# Altium PCB seven_segment_driver.PcbDoc
Units mil, origin at the board's own origin, x right, y up, seen from the top; angles counter-clockwise.
Board outline 8480 x 2790 mil, 2 copper layers (Top Layer, Bottom Layer); 28 components, 48 nets, 176 pads, 263 vias.
Unrouted connection lines stored in the file: 31.
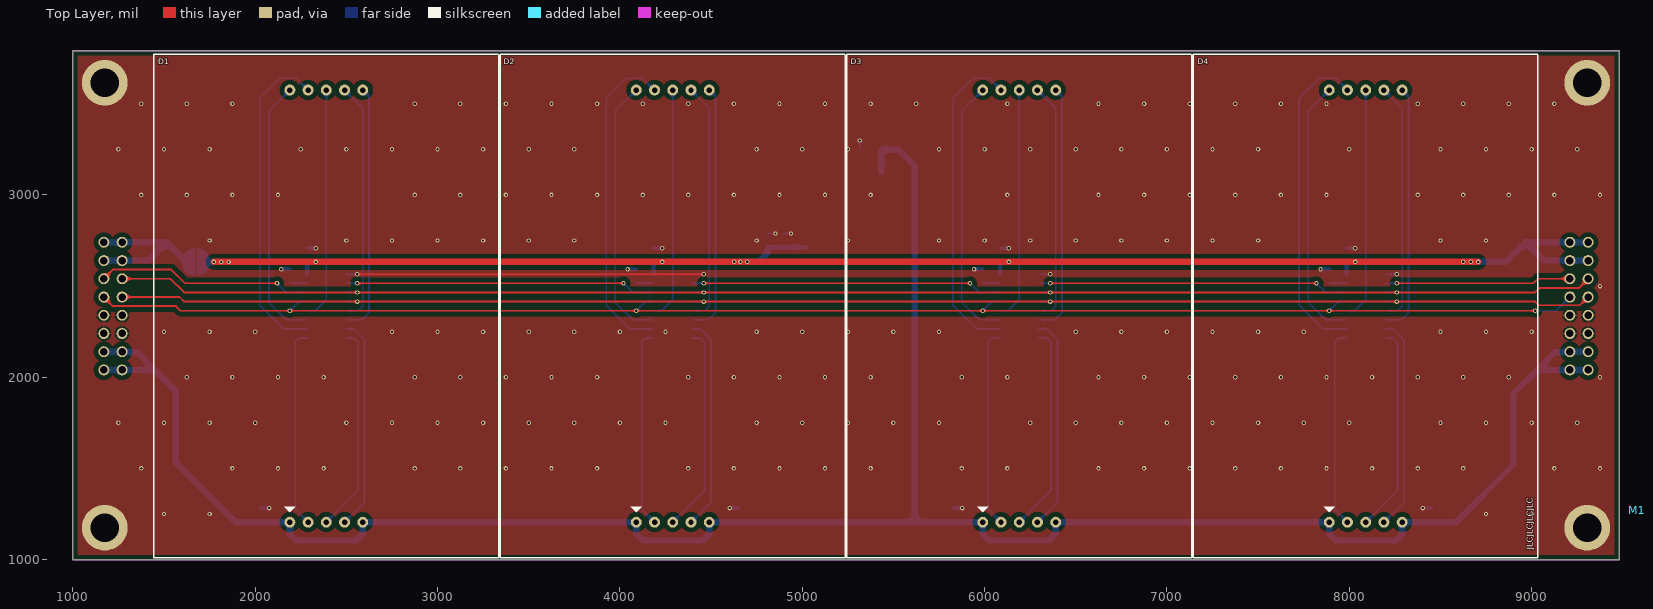
[diagram p0: Top Layer view]
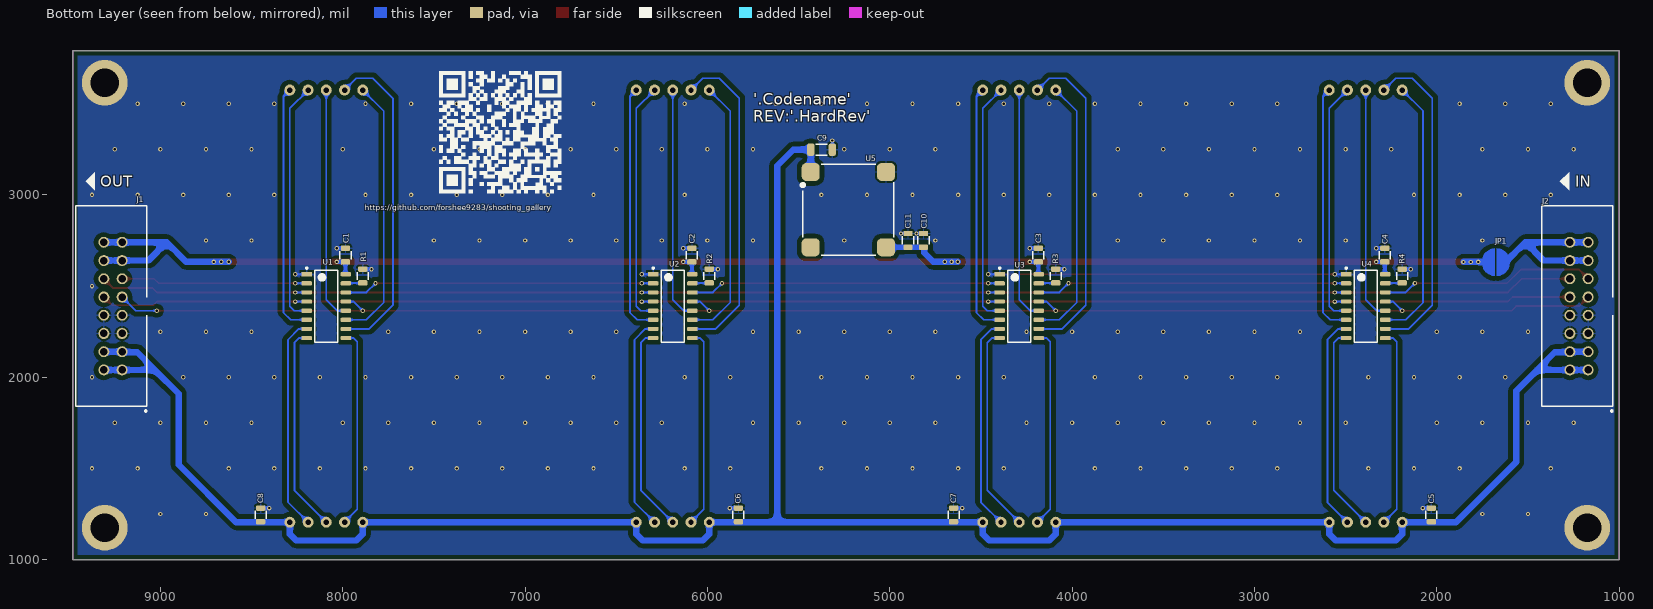
[diagram p1: Bottom Layer view, seen from below]
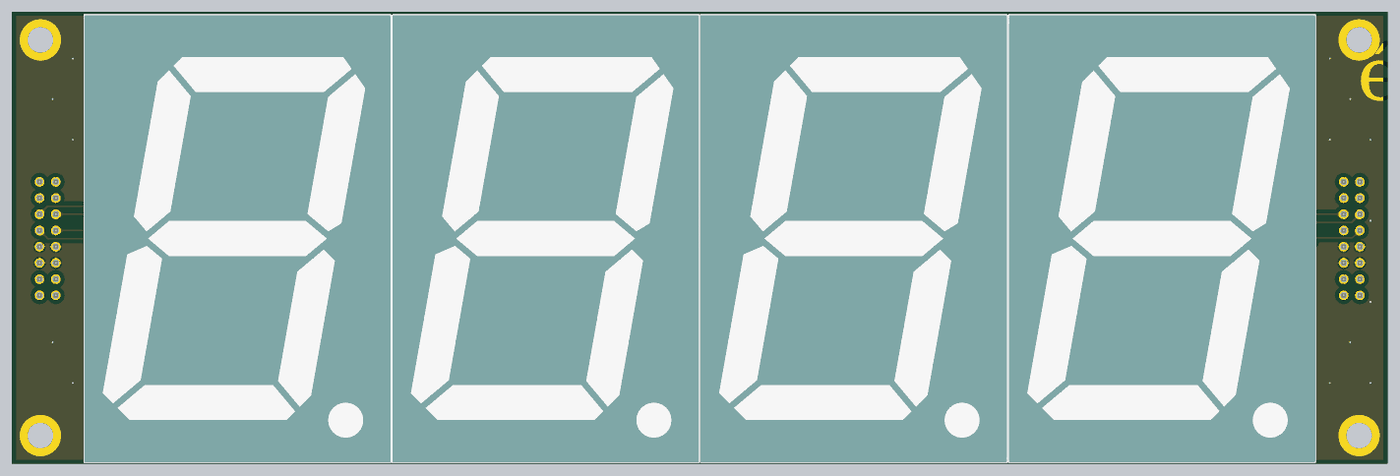
[diagram p2: 3D render of the assembled board from above, using the file's embedded part models]

## Layer stack, top to bottom
Top Solder: solder mask 0.4, Solder Resist, Dk 3.5
Top Layer: signal copper 1.4
Dielectric 1: dielectric 12.6, FR-4, Dk 4.8
Bottom Layer: signal copper 1.4
Bottom Solder: solder mask 0.4, Solder Resist, Dk 3.5

## Board outline
1000,1000 9480,1000 9480,3790 1000,3790

## Design rules (kind name [scope] priority, off if disabled: settings)
Clearance Clearance_Poly [InPolygon] p1: gap=25 ignorepadtopadclearanceinfootprint=FALSE
Clearance [All] p2: gap=10 ignorepadtopadclearanceinfootprint=FALSE
HoleSize [All] p1: absolutevalues=TRUE maxlimit=99999 minlimit=1 maxpercent=80.000 minpercent=20.000
MinimumSolderMaskSliver [All] p1: minsoldermaskwidth=2
PolygonConnect PolygonConnect_Mount [IsPad and not InAnyComponent] p1: connectstyle=Direct reliefconductorwidth=10 reliefentries=4 polygonreliefangle="90 Angle" airgapwidth=10
PolygonConnect [All] p2: thpad.connectstyle=Relief thpad.reliefconductorwidth=10 thpad.reliefentries=4 thpad.polygonreliefangle="90 Angle" thpad.airgapwidth=10 smdpad.connectstyle=Relief smdpad.reliefconductorwidth=10 smdpad.reliefentries=4 smdpad.polygonreliefangle="90 Angle" smdpad.airgapwidth=10 via.connectstyle=Direct via.reliefconductorwidth=10 via.reliefentries=4 via.polygonreliefangle="90 Angle" via.airgapwidth=10
RoutingVias [All] p1: holewidth=28 width=50 viastyle="Through Hole" minholewidth=28 minwidth=50 maxholewidth=28 maxwidth=50
SilkToSilkClearance [All] p1: silktosilkclearance=0
SilkToSolderMaskClearance [IsPad] p1: minsilkscreentomaskgap=1 clearancetoexposedcopper=TRUE
SolderMaskExpansion [All] p1: expansion=2 istentingtop=FALSE
Width [All] p1: maxlimit=9999 minlimit=10 preferedwidth=10
26 further rules are at their usual default settings.

## Components (designator, comment, footprint, x,y, rotation, side; value= is the part's Value field where it differs from the comment)
C1 "0.1µF" Chip0805 7985,2670 r270 bottom
C2 "0.1µF" Chip0805 6085,2670 r270 bottom
C3 "0.1µF" Chip0805 4185,2670 r270 bottom
C4 "0.1µF" Chip0805 2285,2670 r270 bottom
C5 "0.1µF" Chip0805 2030,1245 r270 bottom
C6 "0.1µF" Chip0805 5830,1245 r270 bottom
C7 "0.1µF" Chip0805 4650,1245 r270 bottom
C8 "0.1µF" Chip0805 8450,1245 r270 bottom
C9 "10µF" Chip1206 5374,3248 r0 bottom
C10 "22µF" Chip0805 4815,2751 r270 bottom
C11 "22µF" Chip0805 4900,2751 r270 bottom
D1 "SM412301N" seven_segment_2p3 2390,2390 r0 top
D2 "SM412301N" seven_segment_2p3 4290,2390 r0 top
D3 "SM412301N" seven_segment_2p3 6190,2390 r0 top
D4 "SM412301N" seven_segment_2p3 8090,2390 r0 top
J1 "75869-103LF" IDC_100_2x8 9260,2390 r90 bottom
J2 "75869-103LF" IDC_100_2x8 1220,2390 r90 bottom
JP1 "JUMMPER_NO_CIRCLE" JUMMPER_NO_CIRCLE 1676,2631 r270 bottom
M1 "JLC_NUMBER" JLC_NUMBER 9580,1270 r90 top
R1 "5.23k" Chip0805 7890,2555 r270 bottom
R2 "5.23k" Chip0805 5990,2555 r270 bottom
R3 "5.23k" Chip0805 4090,2555 r270 bottom
R4 "5.23k" Chip0805 2190,2555 r270 bottom
U1 "TLC5916IDR" 16-SOIC 8090,2390 r180 bottom
U2 "TLC5916IDR" 16-SOIC 6190,2390 r180 bottom
U3 "TLC5916IDR" 16-SOIC 4290,2390 r180 bottom
U4 "TLC5916IDR" 16-SOIC 2390,2390 r180 bottom
U5 "K7803JT-500R3-LB" MORNSUN_K78XXJT-500R3-LB 5227,2919 r180 bottom

## Footprints (in the part's own frame and the unit in brackets; to place one, negate y for a bottom-side part, rotate by r counter-clockwise, add the part's x,y. Pads: shape width x height; smd on the part's side, far side on the other; paste and mask are expansions set on the pad)
16-SOIC [mm] "SOIC, 16-Leads, Body 9.90x3.90mm, Pitch 1.27mm, IPC Medium Density"
  rect 1.45x0.6 smd: 1(-2.725,4.445)
  rrect50% 1.45x0.6 smd: 2(-2.725,3.175) 3(-2.725,1.905) 4(-2.725,0.635) 5(-2.725,-0.635) 6(-2.725,-1.905) 7(-2.725,-3.175) 8(-2.725,-4.445) 9(2.725,-4.445) 10(2.725,-3.175) 11(2.725,-1.905) 12(2.725,-0.635) 13(2.725,0.635) 14(2.725,1.905) 15(2.725,3.175) 16(2.725,4.445)
  silkscreen extent -2.85,-5 1.6,5.42, body extent -2,-5 2,5, height 1.75
Chip0805 [mm] "Chip Resistor, 2-Leads, Body 2.05x1.25mm, IPC Medium Density"
  rrect50% 0.75x1.3 smd: 1(-0.955,0) 2(0.955,0)
  silkscreen extent -0.55,-0.77 0.55,0.77, body extent -0.95,-0.55 0.95,0.55, height 0.5
Chip1206 [mm] "Chip Resistor, 2-Leads, Body 3.15x1.60mm, IPC Medium Density"
  rrect50% 1x1.7 smd: 1(-1.5,0) 2(1.5,0)
  silkscreen extent -0.8,-0.75 0.8,0.75, body extent -1.5,-0.72 1.5,0.72, height 0.6
IDC_100_2x8 [mil]
  round 60 hole 41: 1(-350,-50) 2(-350,50) 3(-250,-50) 4(-250,50) 5(-150,-50) 6(-150,50) 7(-50,-50) 8(-50,50) 9(50,-50) 10(50,50) 11(150,-50) 12(150,50) 13(250,-50) 14(250,50) 15(350,-50) 16(350,50)
  silkscreen extent -580,-185 550,205, body extent -542,-175 542,190, height 368
JLC_NUMBER [mil]
JUMMPER_NO_CIRCLE [mil]
  round 1 smd: 1(0,40) 2(0,-40)
  Top Layer region: -75.5,-5 75.5,-5 70.17,-31.78 55,-54.47 32.3,-69.64 5.53,-74.97 5.53,-74.97 -5.53,-74.97 -32.3,-69.64 -55,-54.47 -70.17,-31.78 -75.5,-5
  Top Layer region: 75.5,5 -75.5,5 -70.17,31.78 -55,54.47 -32.3,69.64 -5.53,74.97 -5.53,74.97 5.53,74.97 32.3,69.64 55,54.47 70.17,31.78 75.5,5
  Top Layer region: 0,10 -11.48,12.28 -21.21,18.79 -27.72,28.52 -30,40 -30,40 -27.72,51.48 -21.21,61.21 -11.48,67.72 0,70 0,70 11.48,67.72 21.21,61.21 27.72,51.48 30,40 30,40 27.72,28.52 21.21,18.79 11.48,12.28 0,10
  Top Layer region: 0,-70 -11.48,-67.72 -21.21,-61.21 -27.72,-51.48 -30,-40 -30,-40 -27.72,-28.52 -21.21,-18.79 -11.48,-12.28 0,-10 0,-10 11.48,-12.28 21.21,-18.79 27.72,-28.52 30,-40 30,-40 27.72,-51.48 21.21,-61.21 11.48,-67.72 0,-70
MORNSUN_K78XXJT-500R3-LB [mm]
  rrect50% 2.5x2.5 smd: 1(-5.25,5.25) 2(-5.25,-5.25) 3(5.25,-5.25) 4(5.25,5.25)
  silkscreen extent -6.53,-6.35 6.35,6.35, body extent -6.06,-6.06 6.06,6.06, height 4.52
seven_segment_2p3 [mil]
  round 60 hole 30: 1(-200,-1185.04) 2(-100,-1185.04) 3(0,-1185.04) 4(100,-1185.04) 5(200,-1185.04) 6(200,1185.04) 7(100,1185.04) 8(0,1185.04) 9(-100,1185.04) 10(-200,1185.04)
  silkscreen extent -945,-1380 945,1380, body extent -945,-1378 945,1378, height 472

## Part data
C1 C2 C3 C4 C5 C6 C7 C8: library part C2012X7T2E104K125AA, "CAP CER 0.1UF 250V 10% X7T 0805", Manufacturer="TDK Corporation", Operating Temperature="-55°C ~ 125°C", Package / Case="0805 (2012 Metric)", Ratings=-, Supplier Part Number 1=445-7749-1-ND, Temperature Coefficient=X7T, Tolerance=±10%, Voltage=250V, Applications="General Purpose", Capacitance=0.1µF, Features=-, Height - Seated (Max)=-, HelpURL=http://product.tdk.com/capacitor/mlcc/en/documents/mlcc_commercial_midvoltage_en.pdf, Lead Spacing=-, Lead Style=-, Manufacturer Part Number=C2012X7T2E104K125AA, Mounting Type="Surface Mount, MLCC", PartNumber=C2012X7T2E104K125AA, Series=C, Size / Dimension="0.079\" L x 0.049\" W (2.00mm x 1.25mm)", Supplier 1=Digi-Key, Supplier 2=Mouser, Thickness (Max)="0.057\" (1.45mm)"
C9: library part C3216X5R1H106K160AB, "CAP CER 10UF 50V 10% X5R 1206", Manufacturer="TDK Corporation", Operating Temperature="-55°C ~ 85°C", Package / Case="1206 (3216 Metric)", Ratings=-, Supplier Part Number 1=445-5998-1-ND, Temperature Coefficient=X5R, Tolerance=±10%, Voltage=50V, Applications="General Purpose", Capacitance=10µF, Features=-, Height - Seated (Max)=-, HelpURL=http://product.tdk.com/capacitor/mlcc/en/documents/mlcc_commercial_general_en.pdf, Lead Spacing=-, Lead Style=-, Manufacturer Part Number=C3216X5R1H106K160AB, Mounting Type="Surface Mount, MLCC", PartNumber=C3216X5R1H106K160AB, Series=C, Size / Dimension="0.126\" L x 0.063\" W (3.20mm x 1.60mm)", Supplier 1=Digi-Key, Supplier 2=Mouser, Thickness (Max)="0.071\" (1.80mm)"
C10 C11: library part C2012X5R1A226M085AC, "CAP CER 22UF 10V 20% X5R 0805", Manufacturer="TDK Corporation", Operating Temperature="-55°C ~ 85°C", Package / Case="0805 (2012 Metric)", Ratings=-, Supplier Part Number 1=445-7663-1-ND, Temperature Coefficient=X5R, Tolerance=±20%, Voltage=10V, Applications="General Purpose", Capacitance=22µF, Features=-, Height - Seated (Max)=-, HelpURL=http://product.tdk.com/capacitor/mlcc/en/documents/mlcc_commercial_general_en.pdf, Lead Spacing=-, Lead Style=-, Manufacturer Part Number=C2012X5R1A226M085AC, Mounting Type="Surface Mount, MLCC", PartNumber=C2012X5R1A226M085AC, Series=C, Size / Dimension="0.079\" L x 0.049\" W (2.00mm x 1.25mm)", Supplier 1=Digi-Key, Supplier 2=Mouser, Thickness (Max)="0.037\" (0.95mm)"
D1 D2 D3 D4: "SEGMENTS DISPLAY 2.3\" COMMON ANODE", Manufacturer=ARKLED, Datasheets=https://www.lcsc.com/datasheet/lcsc_datasheet_1811151434_ARKLED-Wuxi-ARK-Tech-Elec-SM412301N_C164872.pdf, Manufacturer Part Number=SM412301N, PartNumber=SM412301N, Supplier 1=Digi-Key, Supplier 2=Mouser, Supplier 3=LCSC, Supplier Part Number 3=C164872
J1 J2: "CONN HEADER 16POS DUAL VERT PCB", Manufacturer=FCI, Supplier Part Number 1=609-1775-ND, HelpURL=http://portal.fciconnect.com/Comergent//fci/drawing/75869.pdf, Manufacturer Part Number=75869-103LF, PartNumber=75869-103LF, Supplier 1=Digi-Key, Supplier 2=Mouser, Supplier Part Number 2=649-75869-103LF
M1: "JLC Order Number Location", Manufacturer Part Number=JLC_NUMBER, PartNumber=JLC_NUMBER
R1 R2 R3 R4: library part CRCW08055K23FKEA, "RES 5.23K OHM 1/8W 1% 0805 SMD", Manufacturer="Vishay Dale", Package / Case="0805 (2012 Metric)", Power (Watts)="0.125W, 1/8W", Supplier Part Number 1=541-5.23KCCT-ND, Temperature Coefficient=±100ppm/°C, Tolerance=±1%, Composition="Thick Film", Features="Automotive AEC-Q200 Qualified", Height="0.020\" (0.50mm)", HelpURL=http://www.vishay.com/doc?20035, Manufacturer Part Number=CRCW08055K23FKEA, Number of Terminations=2, PartNumber=CRCW08055K23FKEA, Resistance=5.23k, Series=CRCW, Size / Dimension="0.079\" L x 0.049\" W (2.00mm x 1.25mm)", Supplier 1=Digi-Key, Supplier 2=Mouser, Supplier Device Package="0805 (2012 Metric)"
U1 U2 U3 U4: "IC LED DRVR LINEAR 120MA 16SOIC", Manufacturer="Texas Instruments", Supplier Part Number 1=296-22710-2-ND, HelpURL=https://www.ti.com/lit/ds/symlink/tlc5916.pdf, Manufacturer Part Number=TLC5916IDR, PartNumber=TLC5916IDR, Supplier 1=Digi-Key, Supplier 2=Mouser, Supplier Part Number 2=595-TLC5916IDR
U5: "LINEAR REGULATOR REPLACEMENT DC", Manufacturer="Mornsun America, LLC", Supplier Part Number 1=2725-K7803JT-500R3-LBCT-ND, HelpURL=https://www.mornsun-power.com/html/pdf/K7803JT-500R3-LB.html, Manufacturer Part Number=K7803JT-500R3-LB, PartNumber=K7803JT-500R3-LB, Supplier 1=Digi-Key
JP1: Manufacturer Part Number=JUMMPER_NO_CIRCLE, PartNumber=JUMMPER_NO_CIRCLE

## Free pads (board coordinates)
  round 250 hole 158: ""(1175,1175) ""(1175,3615) ""(9305,1175) ""(9305,3615)

## Via types
v1: diameter 24, hole 12, Top Layer to Bottom Layer, tented both sides, 263 vias

## Nets (pads, with @x,y where several pads share a name; then routed paths per layer and width w, separated by ;. In a path a pad name is that pad's centre, name@x,y a point inside that pad or via, vN(x,y) a via of type N, cw(c..) or ccw(c..) an arc to the next point about the centre after c; other vN are vias at no path point)
3.3V: C1.2 C2.2 C3.2 C4.2 C10.2 C11.2 J1.13 J1.14 J1.15 J1.16 JP1.2 U1.16 U2.16 U3.16 U4.16 U5.3 | length 9064.3
  Top Layer w35: v1(1772.6,2632.4) 1854,2632.4 v1(2332.6,2632.4) v1(4232.6,2632.4) 4661,2632.4 v1(6132.6,2632.4) v1(8032.6,2632.4) 8625,2632.4 v1(8707.4,2632.4)
  Bottom Layer w20: U4.16 2283.19,2565 2285,2566.81 C4.2 v1(2332.6,2632.4) ; U3.16 4183.19,2565 4185,2566.81 C3.2 v1(4232.6,2632.4) ; U2.16 6083.19,2565 6085,2566.81 C2.2 v1(6132.6,2632.4) ; U1.16 7983.19,2565 7985,2566.81 C1.2 v1(8032.6,2632.4)
  Bottom Layer w25: C10.2 4815.55,2712.85 5019.76,2712.85 U5.3
  Bottom Layer w35: 1731,2632.4 v1(1772.6,2632.4) v1@1853.6,2632.4 ; v1(4627,2633) v1(4661,2633) v1(4698,2633) 4762,2633 4811,2682 4811,2698 ; v1(8625,2633) v1(8666.5,2633) v1@8707.4,2633 ; v1(8707.4,2632.4) 8857.4,2632.4 8965,2740 ; J1.14 J1.13 9065,2640 8965,2740 ; J1.16 J1.15 8965,2740
  other v1: 1814,2632 1854,2632
GND: C1.1 C2.1 C3.1 C4.1 C5.1 C6.1 C7.1 C8.1 C9.1 C10.1 C11.1 J1.5 J1.6 J1.7 J1.8 J2.5 J2.6 J2.7 J2.8 pad. R1.1 R2.1 R3.1 R4.1 U1.1 U2.1 U3.1 U4.1 U5.4 | length 2848.5
  Top Layer w10: v1(2560,2565) v1(4460,2565)
  Bottom Layer w10: U4.1 v1(2560,2565) ; U3.1 v1(4460,2565) ; C10.1 v1(4853.6,2788.6) ; C11.1 v1(4938.6,2788.6) ; C9.1 5314.94,3297.94 v1(5315,3298) ; U2.1 v1(6360,2565) ; U1.1 v1(8260,2565)
  Bottom Layer w20: C5.1 v1(2077.4,1282.6) ; v1(2142.4,2592.6) R4.1 ; C4.1 v1(2332.6,2707.6) ; v1(4042.4,2592.6) R3.1 ; C3.1 v1(4232.6,2707.6) ; v1(4602.6,1282.6) C7.1 ; C6.1 v1(5877.4,1282.6) ; v1(5942.4,2592.6) R2.1 ; C2.1 v1(6132.6,2707.6) ; v1(7842.4,2592.6) R1.1 ; C1.1 v1(8032.6,2707.6) ; v1(8402.6,1282.6) C8.1
  other v1: 1500,1250 1750,1250 8750,1250 9000,1250 1375,1500 1875,1500 2125,1500 2375,1500 2875,1500 3125,1500 3375,1500 3625,1500 3875,1500 4375,1500 4625,1500 4875,1500 5125,1500 5375,1500 5875,1500 6125,1500 6625,1500 6875,1500 7125,1500 7375,1500 7625,1500 7875,1500 8125,1500 8375,1500 8625,1500 9125,1500 9375,1500 1250,1750 1500,1750 1750,1750 2000,1750 2500,1750 2750,1750 3000,1750 3250,1750 3500,1750 3750,1750 4000,1750 4250,1750 4750,1750 5000,1750 5250,1750 5500,1750 5750,1750 6250,1750 6500,1750 6750,1750 7000,1750 7250,1750 7500,1750 7750,1750 8000,1750 8500,1750 8750,1750 9000,1750 9250,1750 1625,2000 1875,2000 2125,2000 2375,2000 2875,2000 3125,2000 3375,2000 3625,2000 3875,2000 4375,2000 4625,2000 4875,2000 5125,2000 5375,2000 5875,2000 6125,2000 6625,2000 6875,2000 7125,2000 7375,2000 7625,2000 7875,2000 8125,2000 8375,2000 8625,2000 8875,2000 9375,2000 1500,2250 1750,2250 2000,2250 2750,2250 3000,2250 3250,2250 3500,2250 3750,2250 4000,2250 4250,2250 4750,2250 5000,2250 5250,2250 5500,2250 5750,2250 6500,2250 6750,2250 7000,2250 7250,2250 7500,2250 7750,2250 8500,2250 8750,2250 9000,2250 9375,2500 1750,2750 2500,2750 2750,2750 3000,2750 3250,2750 3500,2750 3750,2750 4750,2750 5250,2750 5750,2750 6000,2750 6250,2750 6500,2750 6750,2750 7000,2750 7250,2750 7500,2750 8500,2750 8750,2750 1375,3000 1625,3000 1875,3000 2125,3000 2875,3000 3125,3000 3375,3000 3625,3000 3875,3000 4125,3000 4375,3000 4625,3000 4875,3000 5125,3000 5375,3000 6125,3000 6625,3000 6875,3000 7125,3000 7375,3000 7625,3000 7875,3000 8375,3000 8625,3000 8875,3000 9125,3000 9375,3000 1250,3250 1500,3250 1750,3250 2250,3250 2500,3250 2750,3250 3000,3250 3250,3250 3500,3250 3750,3250 4750,3250 5000,3250 5250,3250 5750,3250 6000,3250 6250,3250 6500,3250 6750,3250 7000,3250 7250,3250 7500,3250 8000,3250 8500,3250 8750,3250 9000,3250 9250,3250 1375,3500 1625,3500 1875,3500 2875,3500 3125,3500 3375,3500 3625,3500 3875,3500 4125,3500 4375,3500 4625,3500 4875,3500 5125,3500 5375,3500 5625,3500 6125,3500 6625,3500 6875,3500 7125,3500 7375,3500 7625,3500 7875,3500 8375,3500 8625,3500 8875,3500 9125,3500
NetR1_2: R1.2 U1.15 | length 93.7
  Bottom Layer w10: R1.2 7891.2,2516.2 7981.52,2516.2 U1.15
NetR2_2: R2.2 U2.15 | length 93.7
  Bottom Layer w10: R2.2 5991.2,2516.2 6081.52,2516.2 U2.15
NetR3_2: R3.2 U3.15 | length 93.7
  Bottom Layer w10: R3.2 4091.2,2516.2 4181.52,2516.2 U3.15
NetR4_2: R4.2 U4.15 | length 93.7
  Bottom Layer w10: R4.2 2191.2,2516.2 2281.52,2516.2 U4.15
SS_1_A: D1.7 U4.5 | length 1329.5
  Bottom Layer w10: D1.7 2590,3475.04 2590,2390 2565,2365 U4.5
SS_1_B: D1.6 U4.6 | length 1378.8
  Bottom Layer w10: U4.6 2585,2315 2625,2355 2625,3540.04 D1.6
SS_1_C: D1.4 U4.7 | length 1173.2
  Bottom Layer w10: D1.4 2600,1314.96 2600,2205 2540,2265 U4.7
SS_1_D: D1.3 U4.8 | length 1135.6
  Bottom Layer w10: D1.3 2565,1379.96 2565,2190 2540,2215 U4.8
SS_1_DP: D1.8 U4.12 | length 1282.2
  Bottom Layer w10: U4.12 2330,2365 2390,2425 D1.8
SS_1_E: D1.2 U4.9 | length 1090
  Bottom Layer w10: U4.9 2240,2215 2220,2195 2220,1274.96 D1.2
SS_1_F: D1.9 U4.10 | length 1784
  Bottom Layer w10: U4.10 2155,2265 2025,2395 2025,3530 2135,3640 2225.04,3640 D1.9
SS_1_G: D1.10 U4.11 | length 1459.7
  Bottom Layer w10: D1.10 2075,3460.04 2075,2410 2170,2315 U4.11
SS_2_A: D2.7 U3.5 | length 1329.5
  Bottom Layer w10: D2.7 4490,3475.04 4490,2390 4465,2365 U3.5
SS_2_B: D2.6 U3.6 | length 1378.8
  Bottom Layer w10: U3.6 4485,2315 4525,2355 4525,3540.04 D2.6
SS_2_C: D2.4 U3.7 | length 1173.2
  Bottom Layer w10: D2.4 4500,1314.96 4500,2205 4440,2265 U3.7
SS_2_D: D2.3 U3.8 | length 1135.6
  Bottom Layer w10: D2.3 4465,1379.96 4465,2190 4440,2215 U3.8
SS_2_DP: D2.8 U3.12 | length 1282.2
  Bottom Layer w10: U3.12 4230,2365 4290,2425 D2.8
SS_2_E: D2.2 U3.9 | length 1090
  Bottom Layer w10: U3.9 4140,2215 4120,2195 4120,1274.96 D2.2
SS_2_F: D2.9 U3.10 | length 1784
  Bottom Layer w10: U3.10 4055,2265 3925,2395 3925,3530 4035,3640 4125.04,3640 D2.9
SS_2_G: D2.10 U3.11 | length 1459.7
  Bottom Layer w10: D2.10 3975,3460.04 3975,2410 4070,2315 U3.11
SS_3_A: D3.7 U2.5 | length 1329.5
  Bottom Layer w10: D3.7 6390,3475.04 6390,2390 6365,2365 U2.5
SS_3_B: D3.6 U2.6 | length 1378.8
  Bottom Layer w10: U2.6 6385,2315 6425,2355 6425,3540.04 D3.6
SS_3_C: D3.4 U2.7 | length 1173.2
  Bottom Layer w10: D3.4 6400,1314.96 6400,2205 6340,2265 U2.7
SS_3_D: D3.3 U2.8 | length 1135.6
  Bottom Layer w10: D3.3 6365,1379.96 6365,2190 6340,2215 U2.8
SS_3_DP: D3.8 U2.12 | length 1282.2
  Bottom Layer w10: U2.12 6130,2365 6190,2425 D3.8
SS_3_E: D3.2 U2.9 | length 1090
  Bottom Layer w10: U2.9 6040,2215 6020,2195 6020,1274.96 D3.2
SS_3_F: D3.9 U2.10 | length 1784
  Bottom Layer w10: U2.10 5955,2265 5825,2395 5825,3530 5935,3640 6025.04,3640 D3.9
SS_3_G: D3.10 U2.11 | length 1459.7
  Bottom Layer w10: D3.10 5875,3460.04 5875,2410 5970,2315 U2.11
SS_4_A: D4.7 U1.5 | length 1329.5
  Bottom Layer w10: D4.7 8290,3475.04 8290,2390 8265,2365 U1.5
SS_4_B: D4.6 U1.6 | length 1378.8
  Bottom Layer w10: U1.6 8285,2315 8325,2355 8325,3540.04 D4.6
SS_4_C: D4.4 U1.7 | length 1173.2
  Bottom Layer w10: D4.4 8300,1314.96 8300,2205 8240,2265 U1.7
SS_4_D: D4.3 U1.8 | length 1135.6
  Bottom Layer w10: D4.3 8265,1379.96 8265,2190 8240,2215 U1.8
SS_4_DP: D4.8 U1.12 | length 1282.2
  Bottom Layer w10: U1.12 8030,2365 8090,2425 D4.8
SS_4_E: D4.2 U1.9 | length 1090
  Bottom Layer w10: U1.9 7940,2215 7920,2195 7920,1274.96 D4.2
SS_4_F: D4.9 U1.10 | length 1784
  Bottom Layer w10: U1.10 7855,2265 7725,2395 7725,3530 7835,3640 7925.04,3640 D4.9
SS_4_G: D4.10 U1.11 | length 1459.7
  Bottom Layer w10: D4.10 7775,3460.04 7775,2410 7870,2315 U1.11
SS_BLANK: J1.9 J2.9 U1.13 U2.13 U3.13 U4.13 | length 8555.8
  Top Layer w10: J2.9 1220,2390 1565,2390 1590,2365 v1(2190,2365) v1(4090,2365) v1(5990,2365) v1(7890,2365) v1(9020,2365)
  Bottom Layer w10: v1(2190,2365) 2240,2415 U4.13 ; v1(4090,2365) 4140,2415 U3.13 ; v1(5990,2365) 6040,2415 U2.13 ; v1(7890,2365) 7940,2415 U1.13 ; v1(9020,2365) 9135,2365 J1.9
SS_CLK: J1.12 J2.12 U1.3 U2.3 U3.3 U4.3 | length 8353
  Top Layer w10: J2.12 1535,2540 1610,2465 v1(2560,2465) v1(4460,2465) v1(6360,2465) v1(8260,2465) 9020,2465 9045,2490 9260,2490 J1.12
  Bottom Layer w10: U4.3 v1(2560,2465) ; U3.3 v1(4460,2465) ; U2.3 v1(6360,2465) ; U1.3 v1(8260,2465)
SS_D: J1.11 U1.2 | length 1023.1
  Top Layer w10: v1(8260,2515) 9010,2515 9035,2540 J1.11
  Bottom Layer w10: U1.2 v1(8260,2515)
SS_D_CHAIN0: U1.14 U2.2 | length 1706.1
  Top Layer w10: v1(6360,2515) v1(7820,2515)
  Bottom Layer w10: U2.2 v1(6360,2515) ; v1(7820,2515) 7870,2465 U1.14
SS_D_CHAIN1: U2.14 U3.2 | length 1706.1
  Top Layer w10: v1(4460,2515) v1(5920,2515)
  Bottom Layer w10: U3.2 v1(4460,2515) ; v1(5920,2515) 5970,2465 U2.14
SS_D_CHAIN2: U3.14 U4.2 | length 1706.1
  Top Layer w10: v1(2560,2515) v1(4020,2515)
  Bottom Layer w10: U4.2 v1(2560,2515) ; v1(4020,2515) 4070,2465 U3.14
SS_D_OUT: J2.11 U4.14 | length 1185.2
  Top Layer w10: J2.11 1220,2590 1540,2590 1615,2515 v1(2120,2515)
  Bottom Layer w10: v1(2120,2515) 2170,2465 U4.14
SS_LAT: J1.10 J2.10 U1.4 U2.4 U3.4 U4.4 | length 8328.1
  Top Layer w10: J2.10 1585,2440 1610,2415 v1(2560,2415) v1(4460,2415) v1(6360,2415) v1(8260,2415) 9020,2415 9040,2395 9265,2395 J1.10
  Bottom Layer w10: U4.4 v1(2560,2415) ; U3.4 v1(4460,2415) ; U2.4 v1(6360,2415) ; U1.4 v1(8260,2415)
VCC: C5.2 C6.2 C7.2 C8.2 C9.2 D1.1 D1.5 D2.1 D2.5 D3.1 D3.5 D4.1 D4.5 J1.1 J1.2 J1.3 J1.4 J2.1 J2.2 J2.3 J2.4 U5.1 | length 12885.4
  Bottom Layer w35: J2.1 J2.2 1450,2040 ; J2.3 J2.4 1272.5,2137.5 1352.5,2137.5 1450,2040 ; C5.2@2025,1205 2030,1205 C5.2@2030.04,1204.96 ; C7.2@4655,1205 4650,1205 C7.2@4649.96,1204.96 ; U5.1 5433.37,3126.01 5433.37,3247.68 C9.2 5529,3248 5617,3160 5617,1204.96 ; C6.2@5825,1205 5830,1205 C6.2@5830.04,1204.96 ; C8.2@8455,1205 8450,1205 C8.2@8449.96,1204.96 ; J1.2 J1.1 9030,2040 ; J1.4 J1.3 9207.5,2137.5 9127.5,2137.5 9030,2040 ; 1450,2040 1565,1925 1565,1535 1895.04,1204.96 C5.2@2030.04,1204.96 ; C5.2@2030.04,1204.96 D1.1 2190,1140 2225,1105 2555,1105 2590,1140 D1.5 D2.1 4090,1140 4125,1105 4455,1105 4490,1140 D2.5 C7.2@4649.96,1204.96 ; C7.2@4649.96,1204.96 5617,1204.96 ; 5617,1204.96 C6.2@5830.04,1204.96 ; C6.2@5830.04,1204.96 D3.1 5990,1140 6025,1105 6355,1105 6390,1140 D3.5 D4.1 7890,1140 7925,1105 8255,1105 8290,1140 D4.5 C8.2@8449.96,1204.96 ; C8.2@8449.96,1204.96 8584.96,1204.96 8900,1520 8900,1910 9030,2040
VIN: J2.13 J2.14 J2.15 J2.16 JP1.1 | length 883.6
  Bottom Layer w35: J2.13 1415,2640 1515,2740 ; J2.15 1515,2740 ; 1622.6,2632.4 1515,2740
pads on no net: U5.2

## Polygon pours and split planes (outlines as drawn)
GND on Bottom Layer "Bottom GND" (solid, remove dead copper, pour order 3): 1000,3790 9480,3790 9480,1000 1000,1000
GND on Top Layer "Top GND" (solid, remove dead copper, pour order 2): 1000,3790 9480,3790 9480,1000 1000,1000

## Keep-outs
Keep-Out Layer:
  the board outline again, w1.97

## Silkscreen, mask and mechanical layers (free items; w line width, h text height)
Bottom Overlay:
  drawing of 92 lines, arcs and shapes, not listed
  text "'.Codename'  / REV:'.HardRev'" at 5750,3400 h62
  text "IN" at 1240,3045 h60
  text "OUT" at 9330,3045 h60
  text "https://github.com/forshee9283/shooting_gallery" at 7879,2916.33 h31
Top Solder:
  text "é" at 9294,3246 h650
Bottom Solder:
  text "é" at 9471,3192 h650
Mechanical 1:
  the board outline again, w1.97

## Text inside footprints (layer, text, board x,y; h text height)
M1: Top Overlay "JLCJLCJLCJLC" at 9007.13,1054.85 h33.46 r90